# Altium PCB ASSI_R5.PcbDoc
Units mm, origin at the board's own origin, x right, y up, seen from the top; angles counter-clockwise.
Board outline 74.68 x 35.94 mm, 2 copper layers (Top Layer, Bottom Layer); 37 components, 32 nets, 92 pads, 48 vias.
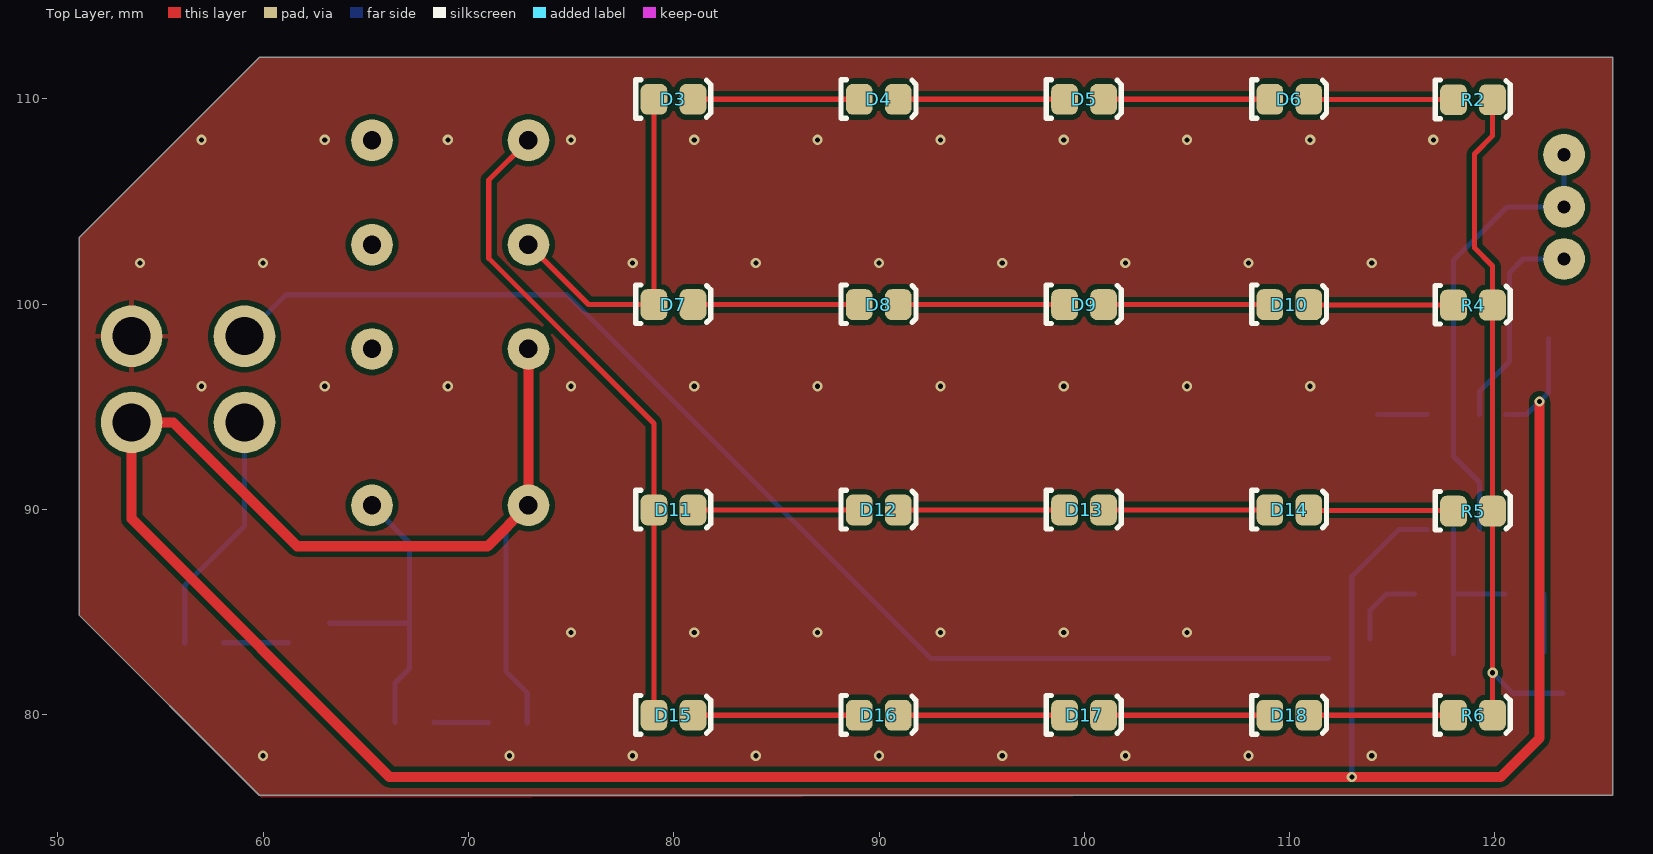
[diagram p0: Top Layer view]
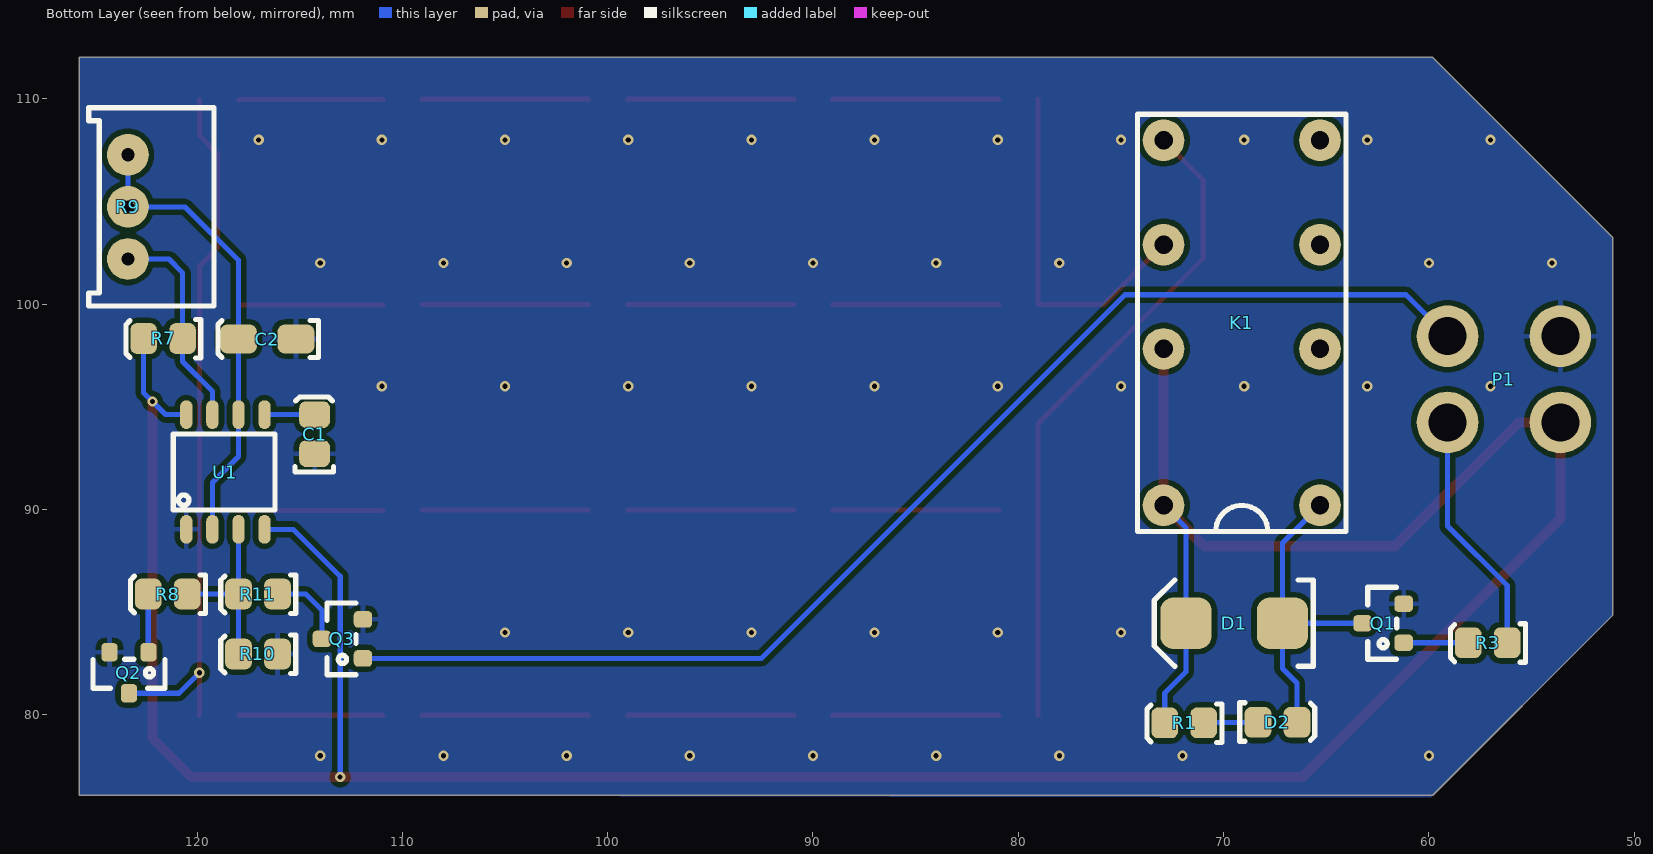
[diagram p1: Bottom Layer view, seen from below]
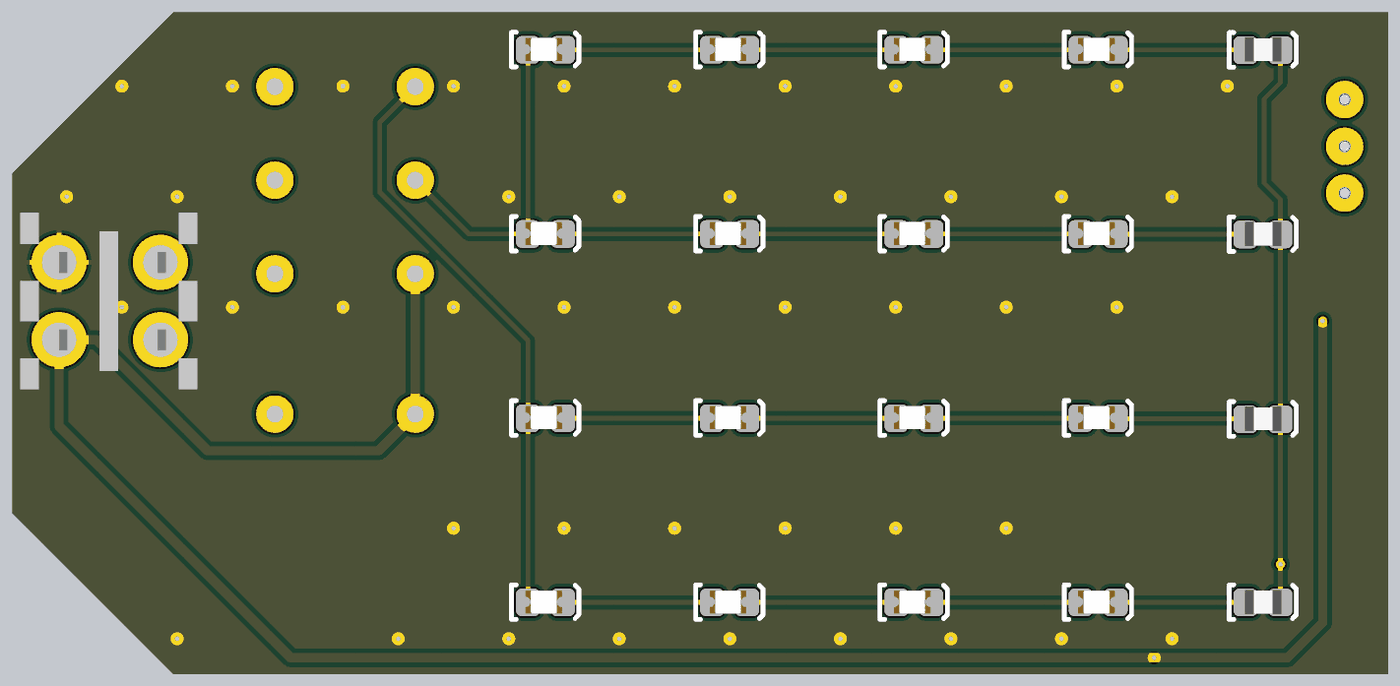
[diagram p2: 3D render of the assembled board from above, using the file's embedded part models]
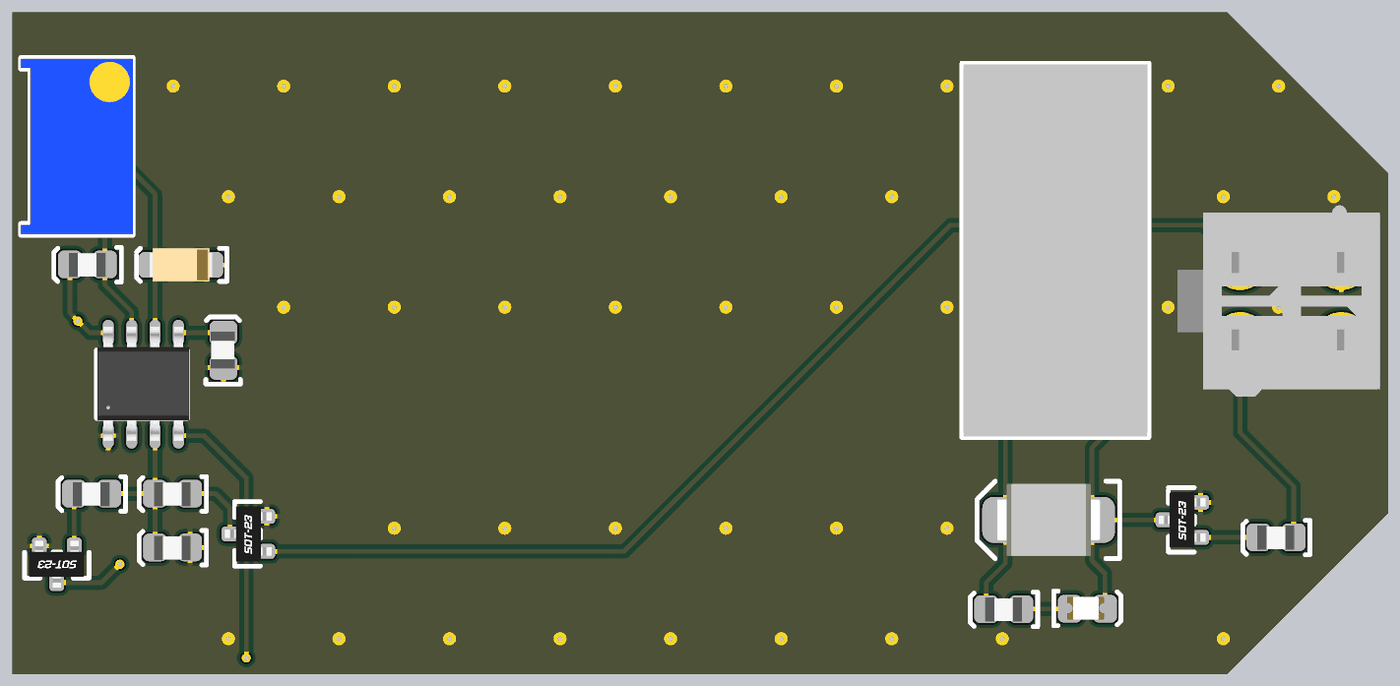
[diagram p3: 3D render of the assembled board from below, using the file's embedded part models]

## Layer stack, top to bottom
Top Solder: solder mask 0.0102, Solder Resist, Dk 3.5
Top Layer: signal copper 0.0356
Dielectric 1: dielectric 0.32, FR-4, Dk 4.8
Bottom Layer: signal copper 0.0356
Bottom Solder: solder mask 0.0102, Solder Resist, Dk 3.5

## Board outline
59.817,76.073 51.054,84.836 51.054,103.251 59.817,112.014 125.73,112.014 125.73,76.073

## Design rules (kind name [scope] priority, off if disabled: settings)
Clearance [All] p1: gap=0.254 ignorepadtopadclearanceinfootprint=FALSE except(0: Arc-Hole Track-Hole SMDPad-Hole THPad-Hole Via-Hole Fill-Hole Poly-Hole Region-Hole Text-Hole)
PolygonConnect [All] p1: connectstyle=Relief reliefconductorwidth=0.254 reliefentries=4 polygonreliefangle="90 Angle" airgapwidth=0.254
RoutingVias [All] p1: holewidth=0.711 width=1.27 viastyle="Through Hole" minholewidth=0.711 minwidth=1.27 maxholewidth=0.711 maxwidth=1.27
SolderMaskExpansion [All] p1: expansion=0.102 istentingtop=FALSE
Width [All] p1: maxlimit=0.254 minlimit=0.254 preferedwidth=0.254
30 further rules are at their usual default settings.

## Components (designator, comment, footprint, x,y, rotation, side; value= is the part's Value field where it differs from the comment)
C1 "100nF" 0805 114.3,93.677 r90 bottom
C2 "22uF" 1206 117.783,98.298 r0 bottom
D1 "SD560BTR" "SMB Diode" 67.383,84.455 r0 bottom
D2 "Yellow" "0805 LED" 67.364,79.655 r180 bottom
D3 "Yellow" "0805 LED" 80,110 r0 top
D4 "Yellow" "0805 LED" 90,110 r0 top
D5 "Yellow" "0805 LED" 100,110 r0 top
D6 "Yellow" "0805 LED" 110,110 r0 top
D7 "Yellow" "0805 LED" 80,100 r0 top
D8 "Yellow" "0805 LED" 90,100 r0 top
D9 "Yellow" "0805 LED" 100,100 r0 top
D10 "Yellow" "0805 LED" 110,100 r0 top
D11 "Blue" "0805 LED" 80,90 r0 top
D12 "Blue" "0805 LED" 90,90 r0 top
D13 "Blue" "0805 LED" 100,90 r0 top
D14 "Blue" "0805 LED" 110,90 r0 top
D15 "Blue" "0805 LED" 80,80 r0 top
D16 "Blue" "0805 LED" 90,80 r0 top
D17 "Blue" "0805 LED" 100,80 r0 top
D18 "Blue" "0805 LED" 110,80 r0 top
K1 "V23105A5303A201" "TI 2-DIL" 69.115,99.085 r90 bottom
P1 "39293046" 39293046 53.594,98.434 r90 bottom
Q1 "2N7002K" "ON SOT-23 MOSFET" 62.23,84.455 r90 bottom
Q2 "2N7002K" "ON SOT-23 MOSFET" 123.317,82.042 r0 bottom
Q3 "2N7002K" "ON SOT-23 MOSFET" 112.919,83.693 r90 bottom
R1 "680R" 0805 71.93,79.577 r0 bottom
R2 "680R" 0805 118.945,109.982 r0 top
R3 "1k" 0805 57.15,83.479 r0 bottom
R4 "680R" 0805 118.945,99.975 r0 top
R5 "680R" 0805 118.945,89.942 r0 top
R6 "680R" 0805 118.945,80 r0 top
R7 "5.1k" 0805 121.666,98.298 r0 bottom
R8 "1k" 0805 121.442,85.852 r0 bottom
R9 "10K (Var)" "B 3296" 122.809,104.648 r270 bottom
R10 "20k" 0805 117.045,82.931 r0 bottom
R11 "100R" 0805 117.045,85.852 r0 bottom value=1k
U1 "NE555DR" "TI 8-SOIC" 117.983,98.704 r90 bottom

## Footprints (in the part's own frame and the unit in brackets; to place one, negate y for a bottom-side part, rotate by r counter-clockwise, add the part's x,y. Pads: shape width x height; smd on the part's side, far side on the other; paste and mask are expansions set on the pad)
0805 [mm]
  rrect50% 1.3x1.5 smd: 1(-0.962,-0.026) 2(0.938,-0.026)
  silkscreen extent -1.85,-0.95 1.8,0.93, body extent -1,-0.65 1,0.66, height 0.73
"0805 LED" [mm]
  rrect50% 1.3x1.5 smd: A(-0.962,-0.026) K(0.938,-0.026)
  silkscreen extent -1.85,-0.95 1.8,0.93, body extent -1.1,-0.62 0.9,0.63, height 1
1206 [mm]
  rrect50% 1.8x1.4 smd: 1(-2.6,0) 2(0.2,0)
  silkscreen extent -3.7,-0.9 1.2,0.9, body extent -2.9,-0.9 0.5,0.9, height 1.85
39293046 [mm]
  round 3 hole 1.85: 1(0,0) 2(0,5.5) 3(-4.2,0) 4(-4.2,5.5)
  body extent -7.3,-2.1 3.1,8.9, height 3.5
"B 3296" [mil]
  round 80 hole 25.2: 1(-103.39,-22) 2(-3.39,-22) 3(96.61,-22)
  silkscreen extent -193,-97 187,143, body extent -191,-97 184,143, height 455
"ON SOT-23 MOSFET" [mm] "NUP2105L"
  rrect50% 0.8x0.9 smd: D(0,1) G(-0.95,-1) S(0.95,-1)
  silkscreen extent -1.75,-0.66 1.75,0.75, body extent -1.5,-1.28 1.5,1.27, height 1
"SMB Diode" [mm]
  rrect50% 2.5x2.5 smd: A(-0.25,0) K(4.45,0)
  silkscreen extent -1.75,-2.1 6,2.1, body extent -0.69,-1.97 4.9,1.97, height 2.5
"TI 2-DIL" [mil]
  round 80 hole 35.43: 1(-350,-150) 4(-50,-150) 6(150,-150) 8(350,-150) 9(350,150) 11(150,150) 13(-50,150) 16(-350,150)
  silkscreen extent -400,-200 400,200, body extent -398,-197 398,197, height 450
"TI 8-SOIC" [mm]
  oval 1.4x0.6 smd: 1(-9.677,2.54) 2(-9.677,1.27) 3(-9.677,0) 4(-9.677,-1.27) 5(-4.089,-1.27) 6(-4.089,0) 7(-4.089,1.27) 8(-4.089,2.54)
  silkscreen extent -8.74,-1.78 -5.03,3.18, body extent -9.96,-1.87 -3.76,3.14, height 1.76

## Part data
C1: library part GCM21BR71H104KA37L, Digikey Part Number=490-6064-1-ND, Manufacturer=muRata, Rated Voltage=50V, Tolerance=±10%, Material=X7R, Part Number=GCM21BR71H104KA37L
C2: library part CC1206MKX5R7BB226, Digikey Part Number=311-1997-2-ND, Manufacturer=YAGEO, Rated Voltage=16V, Tolerance=20%, Material=Ceramic, Part Number=CC1206MKX5R7BB226
D1: "1.2V_F 600V 5A SMB", Digikey Part Number=1655-1530-2-ND, Manufacturer="SMC Diode Solutions", Digikey Link=https://www.digikey.com/product-detail/en/smc-diode-solutions/SD560BTR/1655-1530-2-ND/6022620, Part Number=SD560BTR
D2 D3 D4 D5 D6 D7 D8 D9 D10: library part SML-211YTT86, "Yellow LED Indication - Discrete 1.75V 0805 (2012 Metric)", Digikey Part Number=511-1293-1-ND, Manufacturer="ROHM Semiconductor", Colour=Yellow, Digikey Link=https://www.digikey.com/product-detail/en/rohm-semiconductor/SML-211YTT86/511-1293-1-ND/637106, Part Number=SML-211YTT86
D11 D12 D13 D14 D15 D16 D17 D18: library part SML-MN2BCTT86C, "LED BLUE CLEAR 2012 SMD", Digikey Part Number=846-1207-1-ND, Manufacturer="ROHM Semiconductor", Colour=Blue, Digikey Link=https://www.digikey.com/product-detail/en/rohm-semiconductor/SMLMN2BCTT86C/846-1207-1-ND/6057239, Part Number=SML-MN2BCTT86C
K1: "RELAY TELECOM DPDT 3A 12V", Digikey Part Number=PB387-ND, Manufacturer="TE Connectivity", Digikey Link=https://www.digikey.com/product-detail/en/te-connectivity-potter-brumfield-relays/V23105A5303A201/PB387-ND/291023, Part Number=V23105A5303A201
P1: Digikey Part Number=WM3844-ND, Angle=0, Contact=Tin, Flange=No, Part Number=39293046, Pitch=4.2mm, Positions=4, Row Spacing=5.5mm
Q1 Q2 Q3: "60V 380mA, NFET MOSTFET (Small Signal)", Digikey Part Number=2N7002KCT-ND, Manufacturer="ON Semiconductor", Digikey Link=https://www.digikey.com/product-detail/en/on-semiconductor/2N7002K/2N7002KCT-ND/2060375, LatestRevisionDate=29-May-2009, LatestRevisionNote="IPC-7351 Footprint Added.", PackageDescription="4-Pin SOT-343 Package 1.3 mm Pitch, 2.1 mm Lead Span", PackageReference=SOT-343, PackageVersion=Sep-2000, Part Number=2N7002K, Published=24-Mar-1999, Publisher="Altium Limited", Qty=30
R1 R2 R4 R5 R6: library part RC0805FR07680RL, Digikey Part Number=311-680CRCT-ND, Manufacturer=YAGEO, Rated Voltage=0.125W, Tolerance=0.01, Material=FR-07, Part Number=RC0805FR07680RL
R3 R8 R11: library part RC0805FR071KL, Digikey Part Number=311-1.00KCRCT-ND, Manufacturer=YAGEO, Rated Voltage=0.125W, Tolerance=0.01, Material=FR-07, Part Number=RC0805FR071KL
R7: library part RC0805FR075K1L, Digikey Part Number=311-5.10KCRCT-ND, Manufacturer=YAGEO, Rated Voltage=0.125W, Tolerance=0.01, Material=FR-07, Part Number=RC0805FR075K1L
R9: library part 3296W-1-103LF, Digikey Part Number=3296W-103LF-ND, Manufacturer="Bournes Inc", Rated Voltage=0.5W, Tolerance=0.1, Part Number=3296W-1-103LF
R10: library part RC0805FR0720KL, Digikey Part Number=311-20.0KCRCT-ND, Manufacturer=YAGEO, Rated Voltage=0.125W, Tolerance=0.01, Material=FR-07, Part Number=RC0805FR0720KL
U1: "IC OSC SGL TIMER 100KHZ 8-SOIC", Digikey Part Number=296-6501-1-ND, Manufacturer="Texas Instruments", Digikey Link=https://www.digikey.com.au/product-detail/en/texas-instruments/NE555DR/296-6501-1-ND/372490, Part Number=NE555DR

## Via types
v1: diameter 0.5, hole 0.25, Top Layer to Bottom Layer, 48 vias

## Nets (pads, with @x,y where several pads share a name; then routed paths per layer and width w, separated by ;. In a path a pad name is that pad's centre, name@x,y a point inside that pad or via, vN(x,y) a via of type N, cw(c..) or ccw(c..) an arc to the next point about the centre after c; other vN are vias at no path point)
5V: D1.K K1.13 K1.16 P1.3 R1.2 R7.2 U1.4 U1.8 | length 157
  Top Layer w0.5: K1.13 K1.16 70.934,88.205 61.655,88.205 55.626,94.234 P1.3 53.594,89.535 66.167,76.962 v1(113.03,76.962) 120.269,76.962 122.174,78.867 v1(122.174,95.25)
  Bottom Layer w0.254: R1.2 72.868,81.056 71.833,82.091 D1.K 71.833,89.103 K1.16 ; v1(113.03,76.962) 113.03,86.741 115.316,89.027 U1.4 ; U1.8 121.539,94.615 v1(122.174,95.25) 122.604,95.68 R7.2
Clock: R8.1 R10.2 R11.2 U1.3 | length 8.6
  Bottom Layer w0.254: R10.2 R11.2 ; U1.3 R11.2 ; R8.1 R11.2
"Colour Select": P1.4 R3.1 | length 11.9
  Bottom Layer w0.254: R3.1 56.188,86.287 59.094,89.193 P1.4
Discharge: R7.1 R9.3 U1.7 | length 10.5
  Bottom Layer w0.254: U1.7 119.253,95.758 120.704,97.209 R7.1 120.704,101.527 121.371,102.194 R9.3
"Flash Enable": P1.2 Q3.G | length 61
  Bottom Layer w0.254: P1.2 61.117,100.457 74.803,100.457 92.517,82.743 Q3.G
GND: C1.1 C2.1 P1.1 Q1.S Q2.S Q3.S R10.1 U1.1
  other v1: 60,78 72,78 78,78 84,78 90,78 96,78 102,78 108,78 114,78 75,84 81,84 87,84 93,84 99,84 105,84 57,96 63,96 69,96 75,96 81,96 87,96 93,96 99,96 105,96 111,96 54,102 60,102 78,102 84,102 90,102 96,102 102,102 108,102 114,102 57,108 63,108 69,108 75,108 81,108 87,108 93,108 99,108 105,108 111,108 117,108
NetC1_2: C1.2 U1.5 | length 2.4
  Bottom Layer w0.254: C1.2 U1.5
NetD1_A: D1.A D2.K K1.1 Q1.D | length 15.5
  Bottom Layer w0.254: Q1.D D1.A ; K1.1 67.133,88.367 D1.A ; D2.K 66.426,81.539 67.133,82.246 D1.A
NetD2_A: D2.A R1.1 | length 2.7
  Bottom Layer w0.254: D2.A 68.339,79.616 70.955,79.616 R1.1
NetD3_A: D3.A D7.A K1.11 | length 17.3
  Top Layer w0.254: K1.11 75.847,99.974 D7.A D3.A
NetD3_K: D3.K D4.A | length 8.1
  Top Layer w0.254: D3.K D4.A
NetD4_K: D4.K D5.A | length 8.1
  Top Layer w0.254: D4.K D5.A
NetD5_K: D5.K D6.A | length 8.1
  Top Layer w0.254: D5.K D6.A
NetD6_K: D6.K R2.1 | length 7.1
  Top Layer w0.254: D6.K 110.947,109.965 117.974,109.965 R2.1
NetD7_K: D7.K D8.A | length 8.1
  Top Layer w0.254: D7.K D8.A
NetD8_K: D8.K D9.A | length 8.1
  Top Layer w0.254: D8.K D9.A
NetD9_K: D9.K D10.A | length 8.1
  Top Layer w0.254: D9.K D10.A
NetD10_K: D10.K R4.1 | length 7.1
  Top Layer w0.254: D10.K 110.95,99.961 117.971,99.961 R4.1
NetD11_A: D11.A D15.A K1.9 | length 32.1
  Top Layer w0.254: K1.9 70.993,106.043 70.993,102.235 79.038,94.19 D11.A D15.A
NetD11_K: D11.K D12.A | length 8.1
  Top Layer w0.254: D11.K D12.A
NetD12_K: D12.K D13.A | length 8.1
  Top Layer w0.254: D12.K D13.A
NetD13_K: D13.K D14.A | length 8.1
  Top Layer w0.254: D13.K D14.A
NetD14_K: D14.K R5.1 | length 7.1
  Top Layer w0.254: D14.K 110.967,89.945 117.954,89.945 R5.1
NetD15_K: D15.K D16.A | length 8.1
  Top Layer w0.254: D15.K D16.A
NetD16_K: D16.K D17.A | length 8.1
  Top Layer w0.254: D16.K D17.A
NetD17_K: D17.K D18.A | length 8.1
  Top Layer w0.254: D17.K D18.A
NetD18_K: D18.K R6.1 | length 7
  Top Layer w0.254: D18.K R6.1
NetQ1_G: Q1.G R3.2 | length 3.1
  Bottom Layer w0.254: R3.2 Q1.G
NetQ2_D: Q2.D R2.2 R4.2 R5.2 R6.2 | length 34.6
  Top Layer w0.254: R6.2 R5.2 R4.2 119.883,101.859 118.999,102.743 118.999,107.315 119.883,108.199 R2.2
  Bottom Layer w0.254: v1(119.888,82.042) 120.888,81.042 Q2.D
NetQ2_G: Q2.G R8.2 | length 2.8
  Bottom Layer w0.254: Q2.G 122.373,83.048 122.373,85.872 R8.2
NetQ3_D: Q3.D R11.1 | length 3.9
  Bottom Layer w0.254: Q3.D 113.919,85.09 114.707,85.878 R11.1
Trigger: C2.2 R9.1 R9.2 U1.2 U1.6 | length 22.6
  Bottom Layer w0.254: U1.2 119.253,91.313 117.983,92.583 U1.6 C2.2 117.983,102.136 120.581,104.734 R9.2 R9.1
pads on no net: K1.4 K1.6 K1.8

## Polygon pours and split planes (outlines as drawn)
GND on Top Layer "GND" (solid, pour order 0): 125.73,76.073 125.73,112.014 59.817,112.014 51.054,103.251 51.054,84.836 59.944,75.946
GND on Bottom Layer "GND" (solid, pour order 1): 125.73,76.073 125.73,112.014 59.817,112.014 51.054,103.251 51.054,84.836 59.944,75.946

## Silkscreen, mask and mechanical layers (free items; w line width, h text height)
Mechanical 1:
  the board outline again, w0.254